# Altium PCB task.PcbDoc
Units mil, origin at the board's own origin, x right, y up, seen from the top; angles counter-clockwise.
Board outline 1407.97 x 1163 mil, 2 copper layers (Top Layer, Bottom Layer); 11 components, 10 nets, 43 pads, 10 vias.
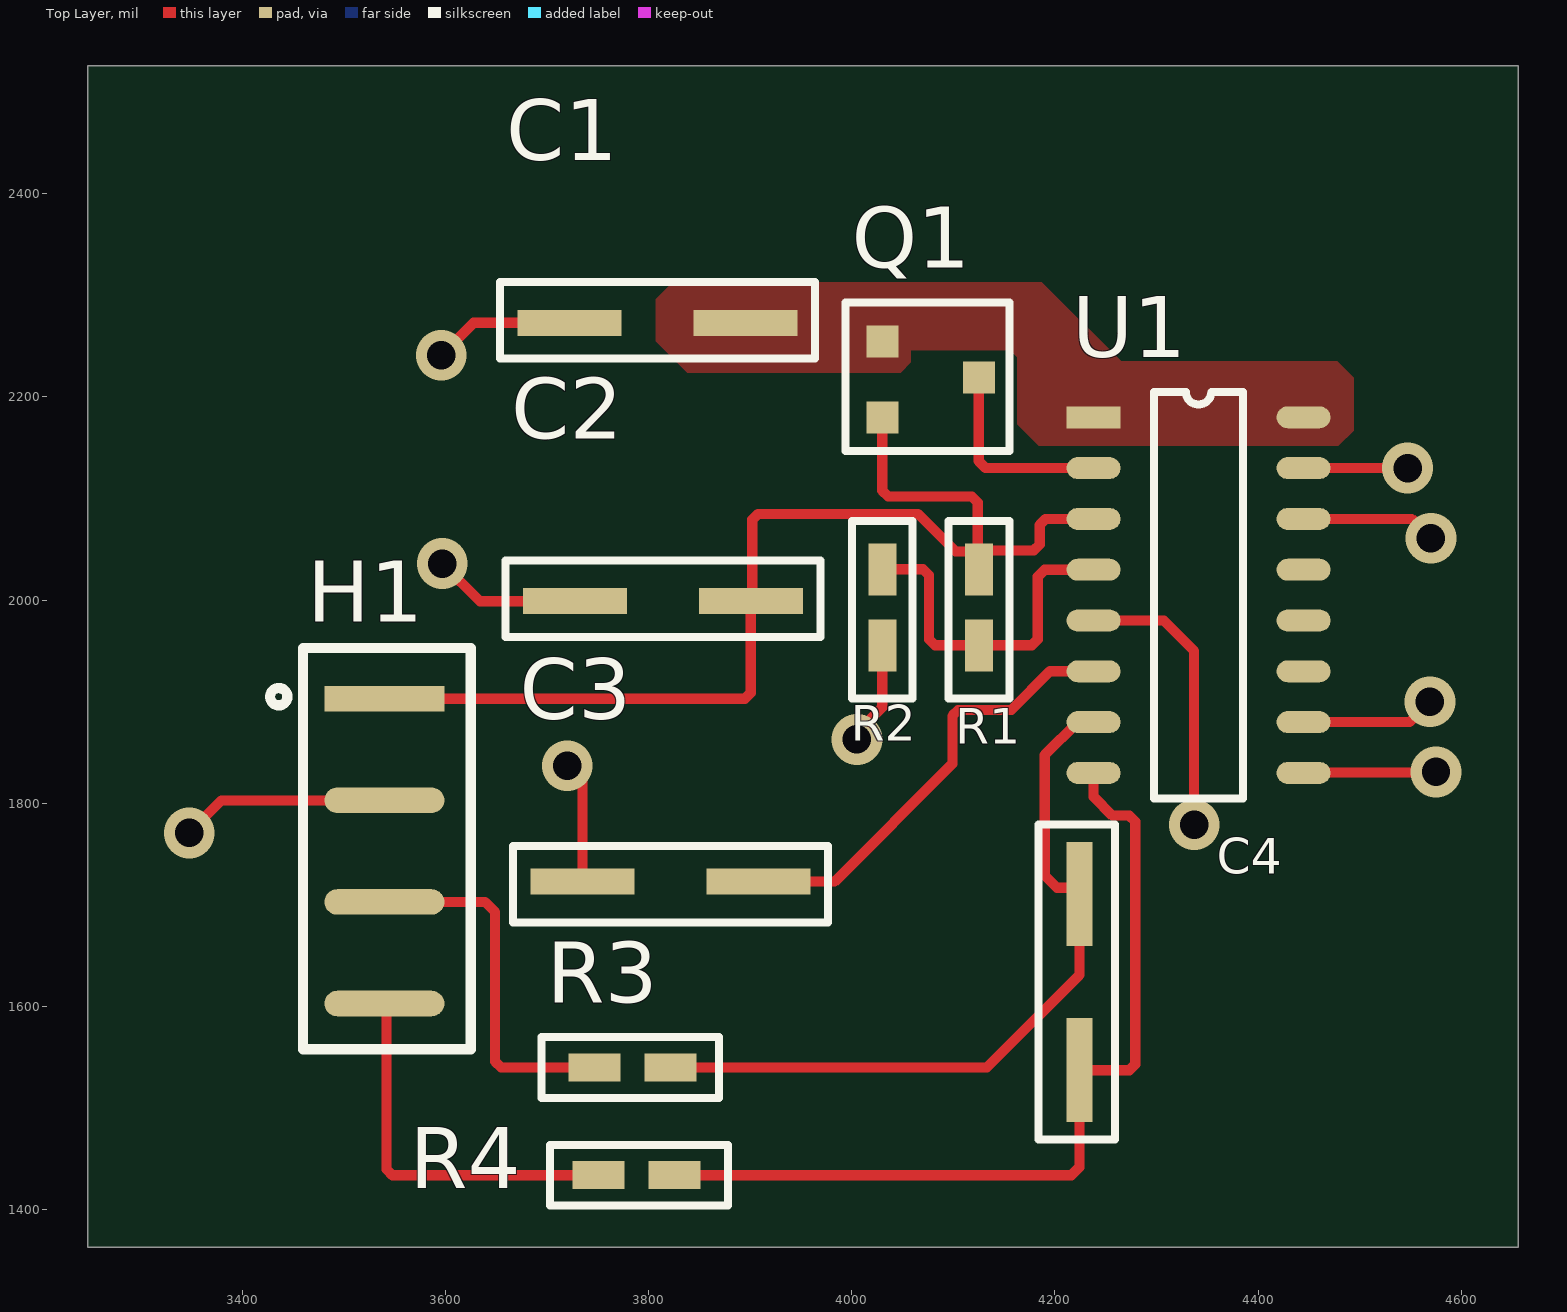
[diagram p0: Top Layer view]
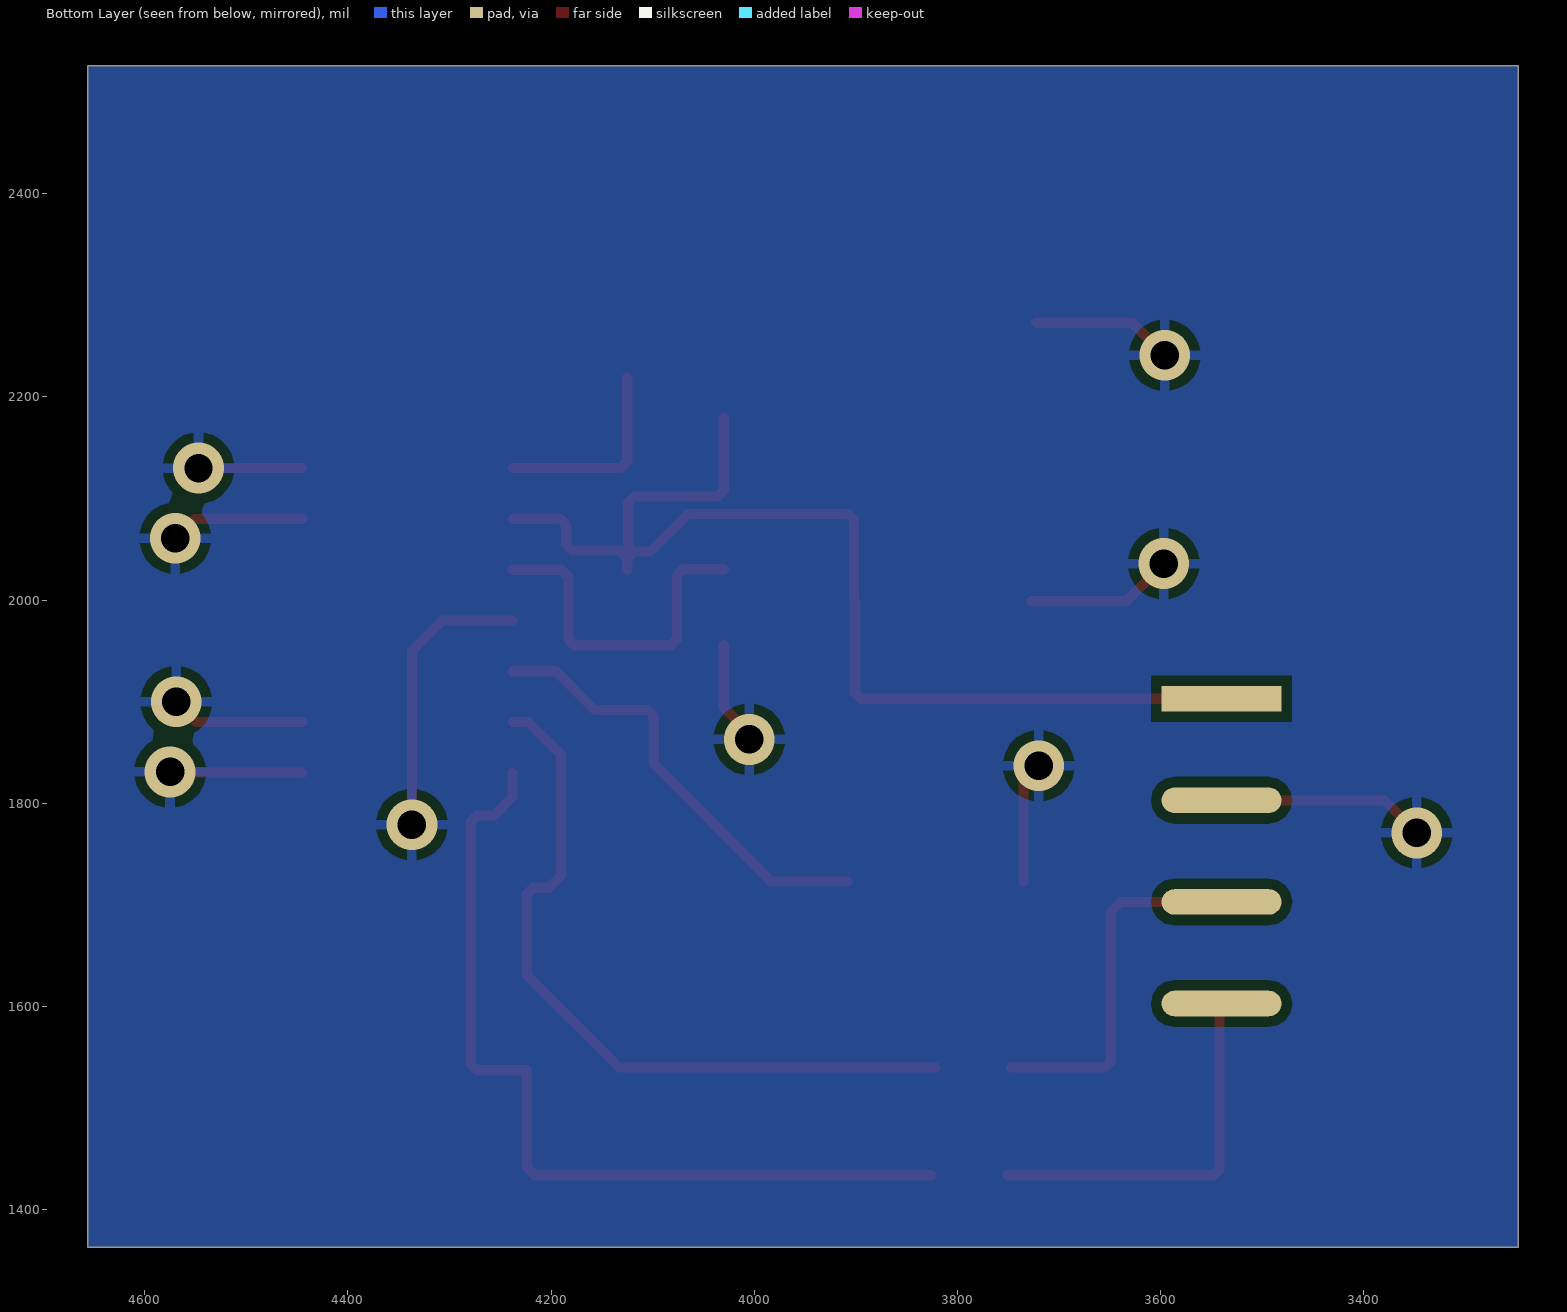
[diagram p1: Bottom Layer view, seen from below]
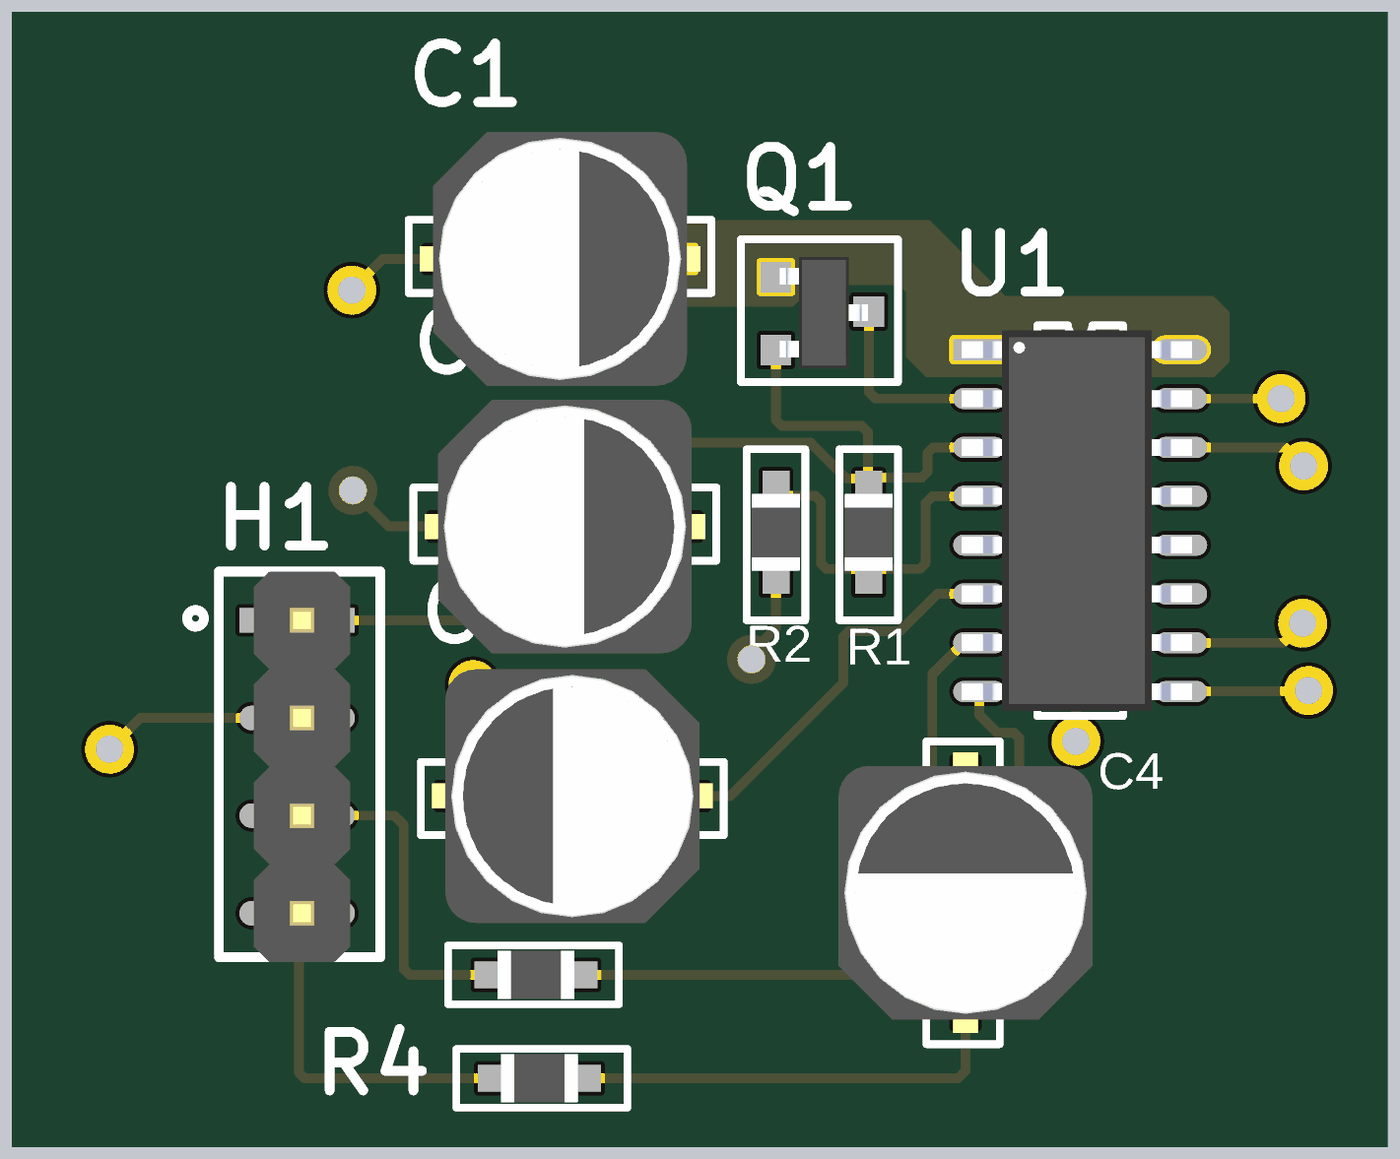
[diagram p2: 3D render of the assembled board from above, using the file's embedded part models]

## Layer stack, top to bottom
Top Solder: solder mask 0.4, Solder Resist, Dk 3.5
Top Layer: signal copper 1.4
Dielectric 1: dielectric 12.6, FR-4, Dk 4.8
Bottom Layer: signal copper 1.4
Bottom Solder: solder mask 0.4, Solder Resist, Dk 3.5

## Board outline
3248.03,1363 4656,1363 4656,2526 3248.03,2526

## Design rules (kind name [scope] priority, off if disabled: settings)
Clearance [All] p1: gap=10 ignorepadtopadclearanceinfootprint=FALSE
PolygonConnect PolygonConnect_1 [All] p1: thpad.connectstyle=Direct thpad.reliefconductorwidth=10 thpad.reliefentries=4 thpad.polygonreliefangle="90 Angle" thpad.airgapwidth=10 smdpad.connectstyle=Direct smdpad.reliefconductorwidth=10 smdpad.reliefentries=4 smdpad.polygonreliefangle="90 Angle" smdpad.airgapwidth=10 via.connectstyle=Relief via.reliefconductorwidth=10 via.reliefentries=4 via.polygonreliefangle="90 Angle" via.airgapwidth=10
PolygonConnect [All] p2: connectstyle=Direct reliefconductorwidth=10 reliefentries=4 polygonreliefangle="90 Angle" airgapwidth=10
RoutingVias [All] p1: holewidth=28 width=50 viastyle="Through Hole" minholewidth=28 minwidth=50 maxholewidth=28 maxwidth=50
SolderMaskExpansion [All] p1: expansion=4 istentingtop=FALSE
SupplyNets "Schematic Supply Nets" [InNet('GND')] p1: voltage=0.000
Width [All] p1: maxlimit=100 minlimit=10 preferedwidth=10 bottomlayer_maxwidth=10 minimp=50.000000 maximp=50.000000 favimp=50.000000
30 further rules are at their usual default settings.

## Components (designator, comment, footprint, x,y, rotation, side; value= is the part's Value field where it differs from the comment)
C1 "10uF" "Capacitor - duplicate" 3809,2273 r0 top
C2 "10uF" "Capacitor - duplicate" 3814,1999 r0 top
C3 "0.1uF" "Capacitor - duplicate" 3821.61,1723 r180 top
C4 "0.1uF" "Capacitor - duplicate" 4224,1624 r90 top
H1 "Header" "Edge Connector" 3540,1903 r270 top
Q1 "Transistor" Transistor 4030,2217 r270 top
R1 "resistance" Resistor 4125,1993 r90 top
R2 "resistance" Resistor 4030,1993 r90 top
R3 "100" Resistor 3784.4,1540 r0 top
R4 "100" Resistor 3788,1434 r180 top
U1 "hx711" SOP16 4238,2180 r0 top

## Footprints (in the part's own frame and the unit in brackets; to place one, negate y for a bottom-side part, rotate by r counter-clockwise, add the part's x,y. Pads: shape width x height; smd on the part's side, far side on the other; paste and mask are expansions set on the pad)
"Capacitor - duplicate" [mm]
  rect 2.6x0.65 smd: 1(-2.2,0) 2(2.2,0)
  silkscreen extent -3.94,-0.89 3.94,1.02, body extent -3.65,-3.3 3.65,3.3, height 7.7
"Edge Connector" [mm]
  rect 0.64x3 smd: 1(0,0)
  oval 0.64x3 smd: 2(2.54,0) 3(5.08,0) 4(7.62,0)
  rect 0.64x3 smd far side: B1(0,0)
  oval 0.64x3 smd far side: B2(2.54,0) B3(5.08,0) B4(7.62,0)
  silkscreen extent -1.27,-2.86 8.76,2.16, body extent -1.27,-1.12 8.89,1.38, height 8.6
Resistor [mm]
  rect 1.3x0.7 smd: 1(-0.95,0) 2(0.95,0)
  silkscreen extent -2.29,-0.76 2.16,0.76, body extent -1,-0.63 1,0.63, height 0.6
SOP16 [mm]
  rect 1.35x0.55 smd: 1(0,0)
  oval 1.35x0.55 smd: 2(0,-1.27) 3(0,-2.54) 4(0,-3.81) 5(0,-5.08) 6(0,-6.35) 7(0,-7.62) 8(0,-8.89) 9(5.25,-8.89) 10(5.25,-7.62) 11(5.25,-6.35) 12(5.25,-5.08) 13(5.25,-3.81) 14(5.25,-2.54) 15(5.25,-1.27) 16(5.25,0)
  silkscreen extent 1.51,-9.53 3.74,0.64, body extent -0.46,-9.4 5.54,0.51, height 1.6
Transistor [mm]
  rect 0.8x0.8 smd: D(-0.051,2.413) G(-0.95,0) S(0.95,0)
  silkscreen extent -1.93,-0.91 1.78,3.18, body extent -1.48,0.09 1.42,2.39, height 1.1

## Part data
C1 C2 C3 C4: library part Capacitor
R3 R4: library part resistance
U1: Manufacturer="Avia Semicon (Xiamen)", Manufacturer part=HX711, supplier part number=C6705483, supplier=lcsc

## Via types
v1: diameter 50, hole 28, Top Layer to Bottom Layer, 8 vias
v2: diameter 50, hole 28, Top Layer to Bottom Layer, tented top, 2 vias

## Nets (pads, with @x,y where several pads share a name; then routed paths per layer and width w, separated by ;. In a path a pad name is that pad's centre, name@x,y a point inside that pad or via, vN(x,y) a via of type N, cw(c..) or ccw(c..) an arc to the next point about the centre after c; other vN are vias at no path point)
GND: C1.1 C2.1 C3.2 H1.2 R2.1 U1.5 U1.9 U1.10 U1.14 U1.15 | length 1495.2
  Top Layer w10: v1(3348,1771) 3348,1771.36 3379.64,1803 H1.2 ; v1(3596,2241) 3628,2273 C1.1 ; v2(3597,2036) 3634,1999 C2.1 ; v1(3720,1837) 3735,1822 C3.2 ; v2(4005,1863) 4005,1869.57 4030,1894.57 R2.1 ; U1.5 4307,1980 4337,1950 v1(4337,1779) ; U1.9 4445.19,1830.5 4574.5,1830.5 v1(4575,1831) ; U1.10 4549,1880 v1(4569,1900) ; U1.14 4551,2080 v1(4570,2061) ; U1.15 v1(4547,2130)
NetC1_2: C1.2 Q1.G U1.1 U1.16
NetC2_2: C2.2 H1.1 Q1.S R1.2 U1.3 | length 1152.2
  Top Layer w10: H1.1 3894.76,1903 3900.61,1908.86 C2.2 3902,2000.39 3902,2079.14 3907.86,2085 4065.14,2085 4102.08,2048.06 4118.16,2048.06 R1.2@4125,2041.22 ; Q1.S 4030,2107.86 4035.86,2102 4118.14,2102 4124,2096.14 R1.2@4124,2043.21 ; R1.2 R1.2@4125,2041.22 ; U1.3 4190.86,2080 4185,2074.14 4185,2054.86 4179.14,2049 4132.78,2049 R1.2@4125,2041.22
NetC3_1: C3.1 U1.6 | length 443.2
  Top Layer w10: C3.1 3983.14,1723 4099,1838.86 4099,1886.14 4104.86,1892 4157,1892 4195,1930 U1.6
NetC4_1: C4.1 R4.1 U1.8 | length 868.3
  Top Layer w10: R4.1 4216.14,1434 4224,1441.86 C4.1 4273.14,1537.39 4279,1543.24 4279,1782.14 4273.14,1788 4256.5,1788 4238,1806.5 U1.8
NetC4_2: C4.2 R3.2 U1.7 | length 741.2
  Top Layer w10: R3.2 4133,1540 4224,1631 C4.2 4217.68,1716.94 4202.06,1716.94 4190,1729 4190,1847.75 4222.25,1880 U1.7
NetH1_3: H1.3 R3.1 | length 360.8
  Top Layer w10: H1.3 3639.14,1703 3649,1693.14 3649,1545.86 3654.86,1540 R3.1
NetH1_4: H1.4 R4.2 | length 375
  Top Layer w10: H1.4 3542,1601 3542,1439.86 3547.86,1434 R4.2
NetQ1_D: Q1.D U1.2 | length 198
  Top Layer w10: Q1.D 4125,2136.86 4131.86,2130 U1.2
NetR1_1: R1.1 R2.2 U1.4 | length 342.9
  Top Layer w10: R2.2 4070.14,2030.4 4076,2024.54 4076,1961.46 4081.86,1955.6 R1.1 4177.14,1955.6 4183,1961.46 4183,2023.14 4189.86,2030 U1.4
pads on no net: H1.B1 H1.B2 H1.B3 H1.B4 U1.11 U1.12 U1.13

## Polygon pours and split planes (outlines as drawn)
NetC1_2 on Top Layer "NETC1_2_L01_P000" (solid, pour order 0): 3815,2247 3807,2255 3807,2296 3824,2313 4187,2313 4265,2235 4478,2235 4494,2219 4494,2167 4479,2152 4184,2152 4163,2173 4163,2239 4156,2246 4058,2246 4058,2234 4048,2224 3838,2224
GND on Bottom Layer "GND_L02_P002" (solid, remove dead copper, pour order 2): 3248.03,1363 4656,1363 4656,2526 3248.03,2526